# Altium PCB PCB3.PcbDoc
Units mm, origin at the board's own origin, x right, y up, seen from the top; angles counter-clockwise.
Board outline 40 x 40 mm, 2 copper layers (Top Layer, Bottom Layer); 33 components, 27 nets, 120 pads, 15 vias.
Unrouted connection lines stored in the file: 2.
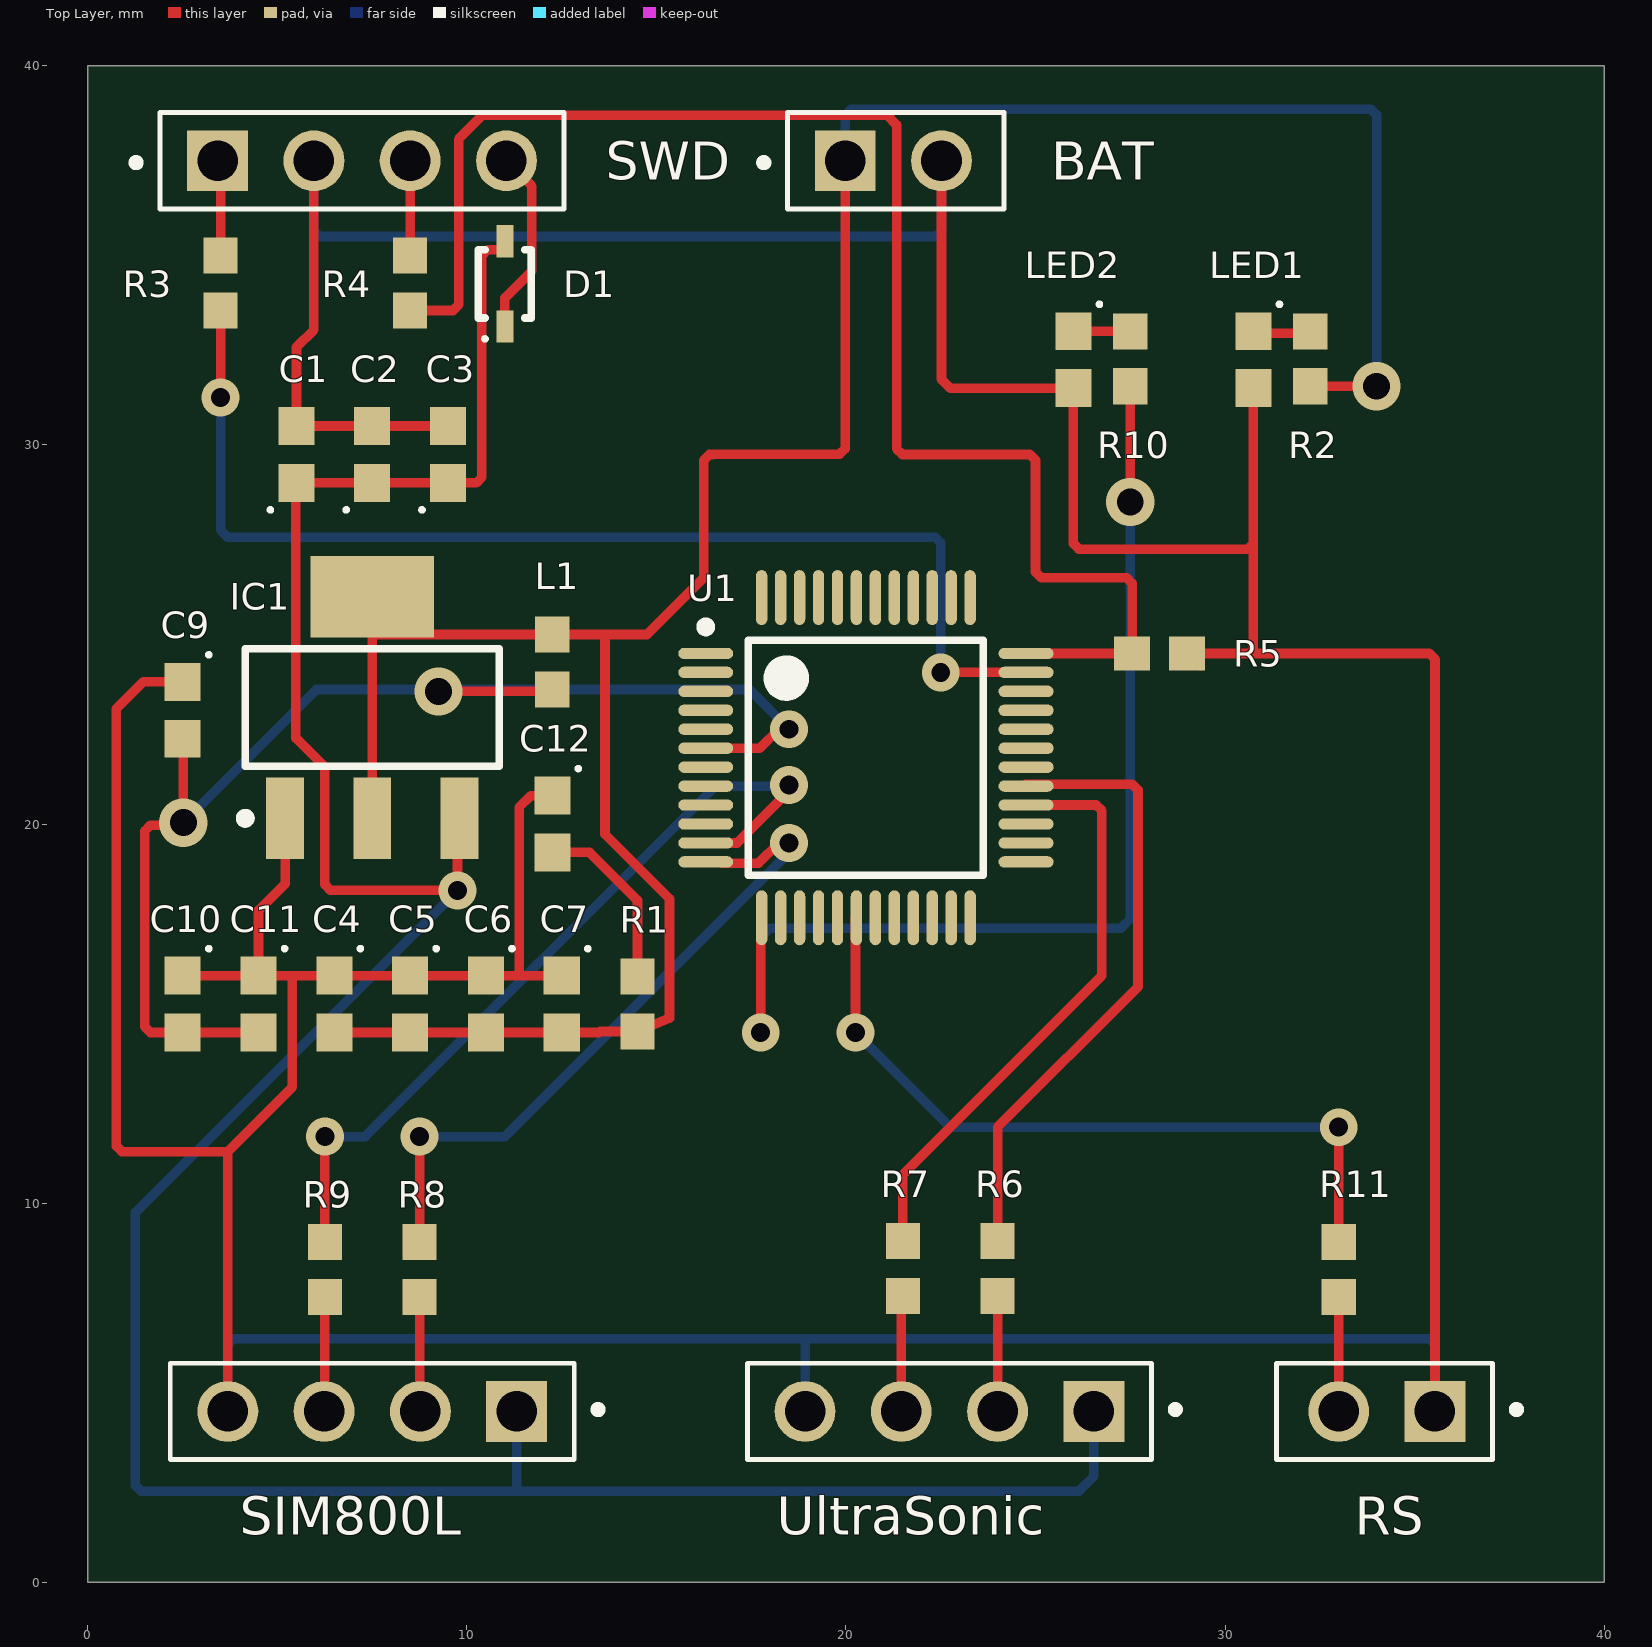
[diagram p0: Top Layer view]
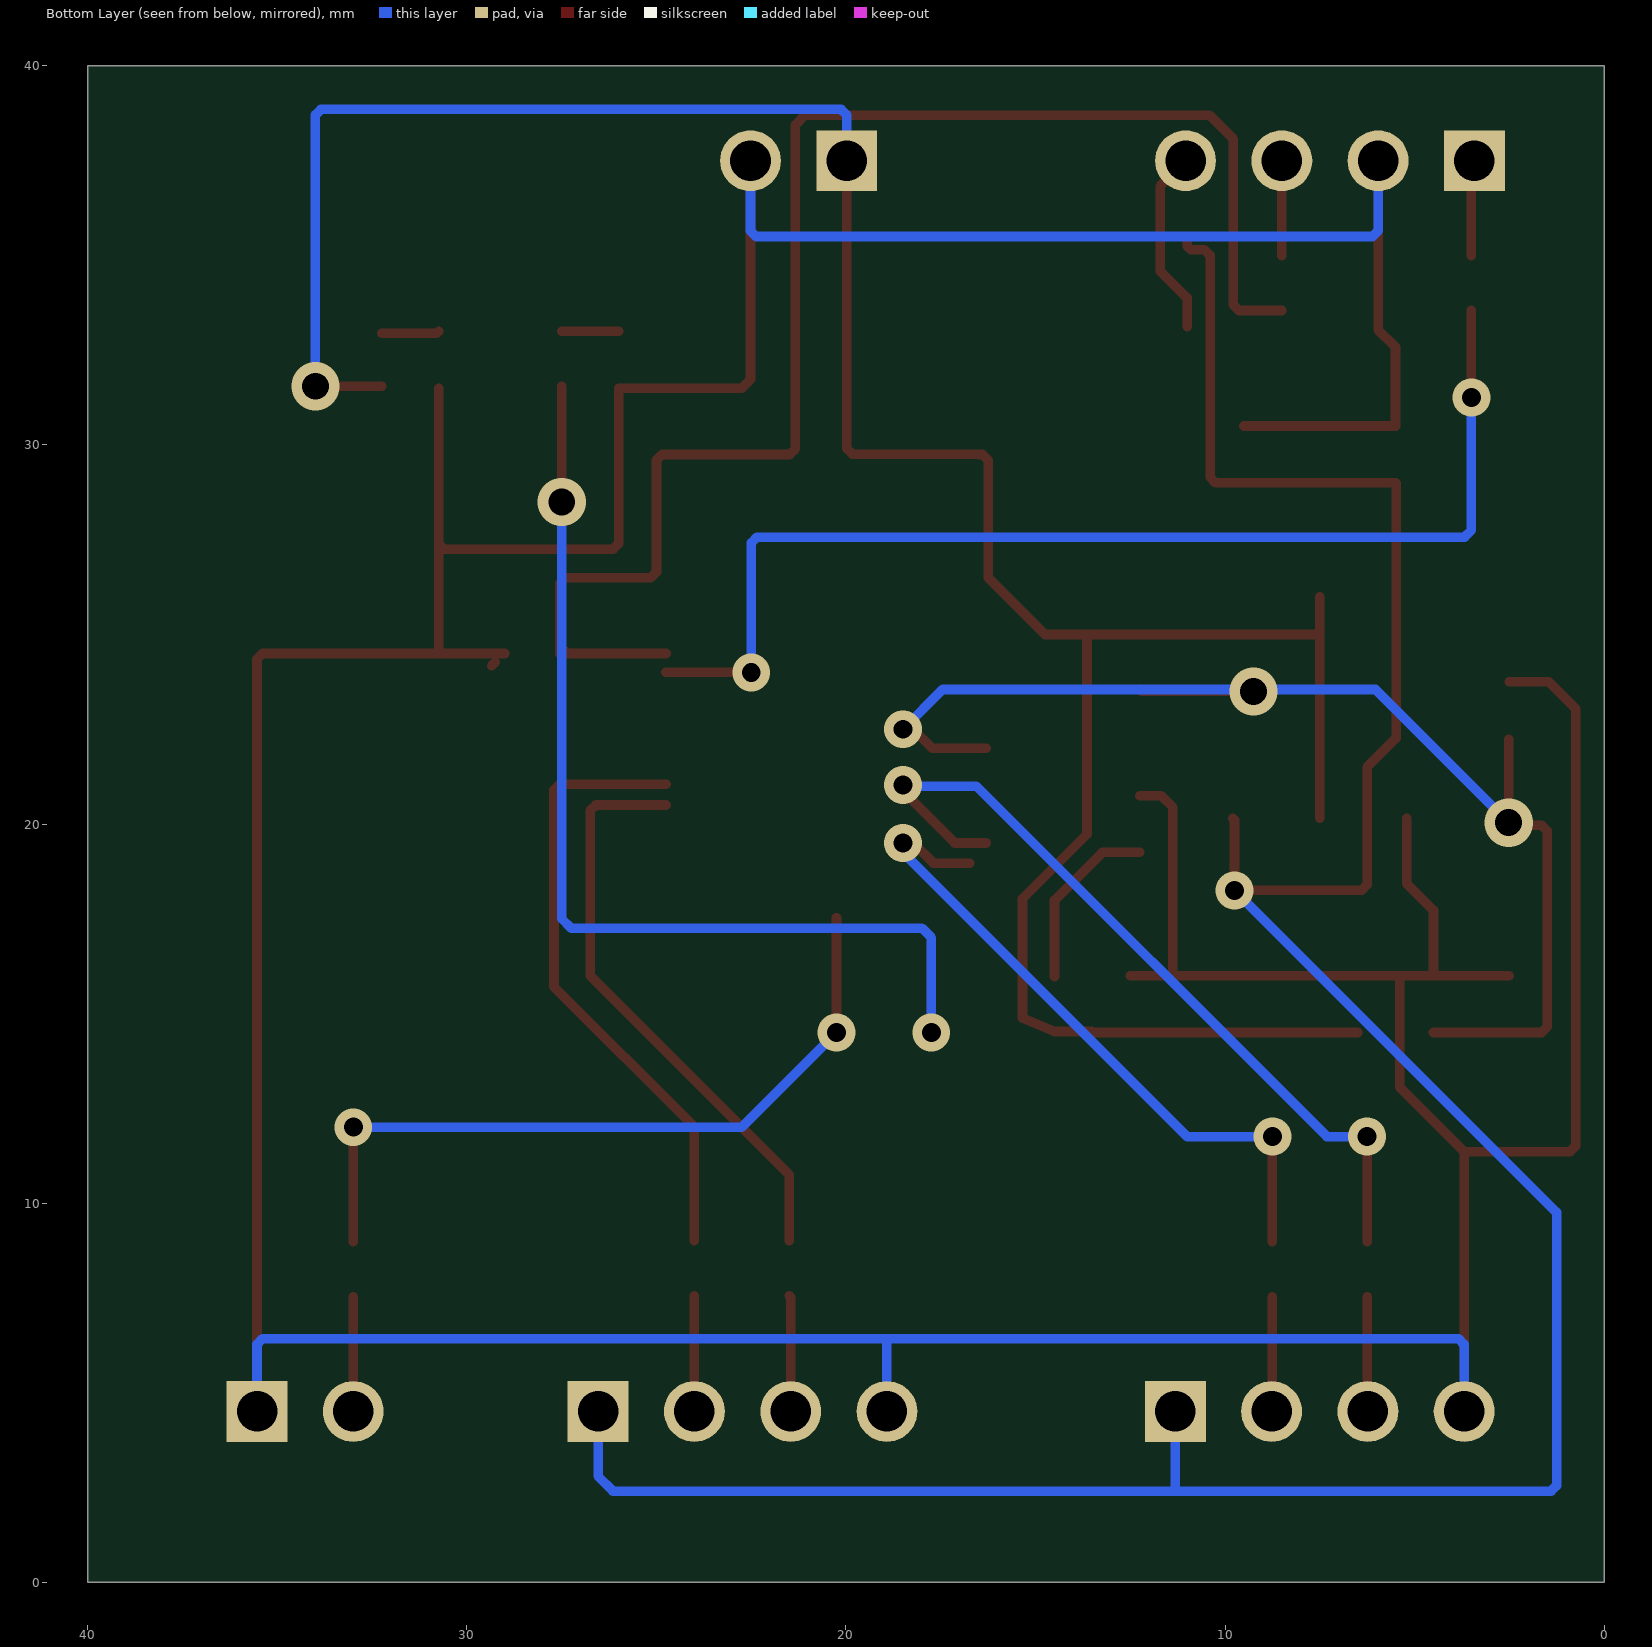
[diagram p1: Bottom Layer view, seen from below]
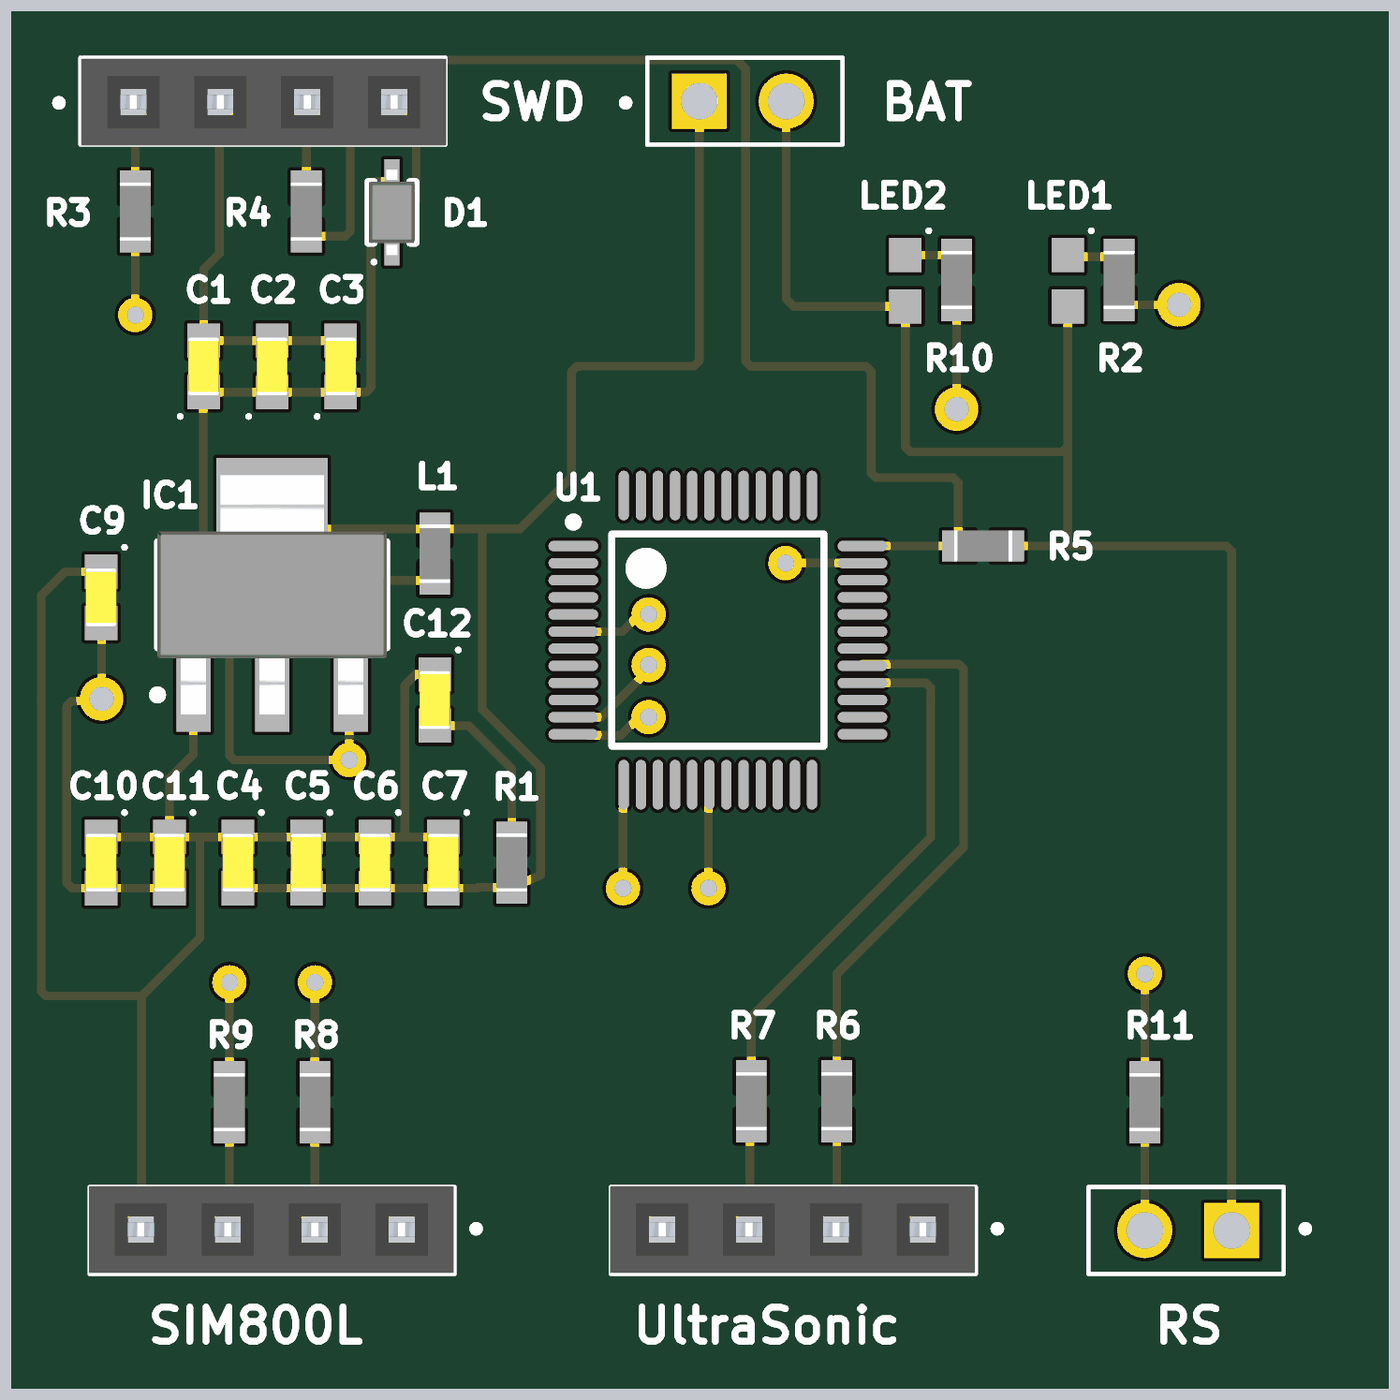
[diagram p2: 3D render of the assembled board from above, using the file's embedded part models]

## Layer stack, top to bottom
Top Solder: solder mask 0.0102, Solder Resist, Dk 3.5
Top Layer: signal copper 0.0356
Dielectric 1: dielectric 0.32, FR-4, Dk 4.8
Bottom Layer: signal copper 0.0356
Bottom Solder: solder mask 0.0102, Solder Resist, Dk 3.5

## Board outline
0,0 0,40 40,40 40,0

## Design rules (kind name [scope] priority, off if disabled: settings)
Clearance [All] p1: gap=0.254 ignorepadtopadclearanceinfootprint=FALSE except(0: Arc-Hole Track-Hole SMDPad-Hole THPad-Hole Via-Hole Fill-Hole Poly-Hole Region-Hole Text-Hole)
PolygonConnect [All] p1: connectstyle=Relief reliefconductorwidth=0.254 reliefentries=4 polygonreliefangle="90 Angle" airgapwidth=0.254
RoutingVias [All] p1: holewidth=0.711 width=1.27 viastyle="Through Hole" minholewidth=0.711 minwidth=1.27 maxholewidth=0.711 maxwidth=1.27
SolderMaskExpansion [All] p1: expansion=0.102 istentingtop=FALSE
Width [All] p1: maxlimit=0.254 minlimit=0.254 preferedwidth=0.254
30 further rules are at their usual default settings.

## Components (designator, comment, footprint, x,y, rotation, side; value= is the part's Value field where it differs from the comment)
BAT "VBat" Vbat 21.25,37.5 r0 top (schematic designator BAT1)
C1 "Capacitor" Capacitor_smd_0863 5.5,29.75 r90 top
C2 "Capacitor" Capacitor_smd_0863 7.5,29.75 r90 top
C3 "Capacitor" Capacitor_smd_0863 9.5,29.75 r90 top
C4 "Capacitor" Capacitor_smd_0863 6.5,15.25 r270 top
C5 "Capacitor" Capacitor_smd_0863 8.5,15.25 r270 top
C6 "Capacitor" Capacitor_smd_0863 10.5,15.25 r270 top
C7 "Capacitor" Capacitor_smd_0863 12.5,15.25 r270 top
C9 "Capacitor" Capacitor_smd_0863 2.5,23 r270 top
C10 "Capacitor" Capacitor_smd_0863 2.5,15.25 r270 top
C11 "Capacitor" Capacitor_smd_0863 4.5,15.25 r270 top
C12 "Capacitor" Capacitor_smd_0863 12.25,20 r270 top
D1 "D_SCHOTTKY" Diod_Shottky 11,34.25 r90 top
IC1 "LD1117" LD1117 7.5,23.075 r90 top
L1 "450 mA" Resistor_smd_0603 12.25,24.275 r270 top
LED1 "Red" Led_smd_0603_Red 30.75,32.25 r270 top
LED2 "Red" Led_smd_0603_Red 26,32.25 r270 top
R1 "10 k" Resistor_smd_0603 14.5,15.25 r270 top
R2 "300 Om" Resistor_smd_0603 32.25,32.275 r90 top
R3 "100 Om" Resistor_smd_0603 3.5,34.275 r270 top
R4 "100 Om" Resistor_smd_0603 8.5,34.275 r270 top
R5 "100 Om" Resistor_smd_0603 28.275,24.5 r180 top
R6 "100 Om" Resistor_smd_0603 24,8.275 r270 top
R7 "100 Om" Resistor_smd_0603 21.5,8.275 r270 top
R8 "100 Om" Resistor_smd_0603 8.75,8.25 r270 top
R9 "100 Om" Resistor_smd_0603 6.25,8.25 r270 top
R10 "300 Om" Resistor_smd_0603 27.5,32.275 r90 top
R11 "300 Om" Resistor_smd_0603 33,8.25 r90 top
RS "Reed_Switch" Vbat 34.27,4.5 r180 top (schematic designator RS1)
SIM800L "SIM800L" Connector_Prog 7.5,4.5 r180 top (schematic designator CN3)
SWD "SWD" Connector_Prog 7.23,37.5 r0 top (schematic designator CN1)
U1 "STM32G070" STM32G070 20.525,21.75 r0 top
UltraSonic "UltraSonic" Connector_Prog 22.73,4.5 r180 top (schematic designator CN2)

## Footprints (in the part's own frame and the unit in brackets; to place one, negate y for a bottom-side part, rotate by r counter-clockwise, add the part's x,y. Pads: shape width x height; smd on the part's side, far side on the other; paste and mask are expansions set on the pad)
Capacitor_smd_0863 [mm] "Chip Capacitor, 2-Leads, Body 1,60x0,80mm, IPC Medium Density"
  rect 1x0.95 smd: 1(-0.75,0) 2(0.75,0)
  silkscreen extent -1.51,0.64 -1.41,0.74, body extent -0.85,-0.45 0.85,0.45, height 0.45
Connector_Prog [mm]
  rect 1.605x1.605 hole 1.07: 1(-3.81,0)
  round 1.605 hole 1.07: 2(-1.27,0) 3(1.27,0) 4(3.81,0)
  silkscreen extent -6.06,-1.27 5.33,1.27, body extent -5.31,-1.3 5.36,1.24, height 8.51
Diod_Shottky [mm] "SODFL, 2-Leads, Body 1,25x2,50mm, IPC Medium Density"
  rect 0.85x0.45 smd: 1(-1.125,0) 2(1.125,0)
  silkscreen extent -1.5,-0.7 0.9,0.7, body extent -1.25,-0.67 1.25,0.67, height 1.1
LD1117 [mm] "SOT223, 4-Leads, Body 6,50x7,00mm (avg), Pitch 2,30mm, IPC Medium Density"
  rect 2.15x1 smd: 1(-2.925,2.3) 2(-2.925,0) 3(-2.925,-2.3)
  rect 2.15x3.25 smd: 4(2.925,0)
  silkscreen extent -3.05,-3.35 1.55,3.47, body extent -3.5,-3.35 3.5,3.35, height 1.8
Led_smd_0603_Red [mm]
  rect 1x0.95 smd: 1(-0.75,0) 2(0.75,0)
  silkscreen extent -1.51,0.64 -1.41,0.74, body extent -0.85,-0.45 0.85,0.45, height 0.5
Resistor_smd_0603 [mm] "Chip Resistor, 2-Leads, Body 1,60x0,80mm, IPC Medium Density"
  rect 0.95x0.9 smd: 1(-0.725,0) 2(0.725,0)
  body extent -0.85,-0.45 0.85,0.45, height 0.45
STM32G070 [mm]
  oval 1.45x0.3 smd: 1(-4.225,2.75) 2(-4.225,2.25) 3(-4.225,1.75) 4(-4.225,1.25) 5(-4.225,0.75) 6(-4.225,0.25) 7(-4.225,-0.25) 8(-4.225,-0.75) 9(-4.225,-1.25) 10(-4.225,-1.75) 11(-4.225,-2.25) 12(-4.225,-2.75) 25(4.225,-2.75) 26(4.225,-2.25) 27(4.225,-1.75) 28(4.225,-1.25) 29(4.225,-0.75) 30(4.225,-0.25) 31(4.225,0.25) 32(4.225,0.75) 33(4.225,1.25) 34(4.225,1.75) 35(4.225,2.25) 36(4.225,2.75)
  oval 0.3x1.45 smd: 13(-2.75,-4.225) 14(-2.25,-4.225) 15(-1.75,-4.225) 16(-1.25,-4.225) 17(-0.75,-4.225) 18(-0.25,-4.225) 19(0.25,-4.225) 20(0.75,-4.225) 21(1.25,-4.225) 22(1.75,-4.225) 23(2.25,-4.225) 24(2.75,-4.225) 37(2.75,4.225) 38(2.25,4.225) 39(1.75,4.225) 40(1.25,4.225) 41(0.75,4.225) 42(0.25,4.225) 43(-0.25,4.225) 44(-0.75,4.225) 45(-1.25,4.225) 46(-1.75,4.225) 47(-2.25,4.225) 48(-2.75,4.225)
  silkscreen extent -4.35,-3.1 3.1,3.57, body extent -3.5,-3.5 3.5,3.5, height 1.6
Vbat [mm]
  rect 1.605x1.605 hole 1.07: 1(-1.27,0)
  round 1.605 hole 1.07: 2(1.27,0)
  silkscreen extent -3.52,-1.27 2.92,1.27

## Part data
C1 C2 C3 C4 C5 C6 C7 C9 C10 C11 C12: Voltage=16v
  C1 C2 C4 C12: Сapacity=10u
  C3 C6 C7 C10 C11: Сapacity=0.1u
  C5 C9: Сapacity=4.7u
D1: library part Diod_Shottky, Voltage=20v
IC1: Voltage=3.3v
L1: library part Filter
LED1 LED2: library part LED
R1 R2 R3 R4 R5 R6 R7 R8 R9 R10 R11: library part Resistor
SIM800L SWD UltraSonic: library part Connector_programming

## Via types
v1: diameter 1, hole 0.5, Top Layer to Bottom Layer, 11 vias
v2: diameter 1.27, hole 0.711, Top Layer to Bottom Layer, 4 vias

## Nets (pads, with @x,y where several pads share a name; then routed paths per layer and width w, separated by ;. In a path a pad name is that pad's centre, name@x,y a point inside that pad or via, vN(x,y) a via of type N, cw(c..) or ccw(c..) an arc to the next point about the centre after c; other vN are vias at no path point)
5v: C1.1 C2.1 C3.1 D1.2 IC1.3 SIM800L.1 UltraSonic.1 | length 76.5
  Top Layer w0.254: IC1.3 9.75,20.1 v1(9.75,18.25) 6.399,18.25 6.25,18.399 6.25,21.5 5.486,22.264 5.486,28.986 C1.1 C2.1 C3.1 10.245,29 10.394,29.149 10.394,35.003 10.543,35.151 10.902,35.151 11,35.249 D1.2
  Bottom Layer w0.254: v1(9.75,18.25) 1.25,9.75 1.25,2.548 1.399,2.399 26.149,2.399 26.54,2.79 UltraSonic.1 ; 11.31,2.5 SIM800L.1
Door: R11.2 U1.18 | length 19.8
  Top Layer w0.254: v1(20.25,14.5) U1.18@20.25,17.525 ; R11.2 33,9.692 v1(33,12)
  Bottom Layer w0.254: v1(20.25,14.5) 22.75,12 v1(33,12)
ECHO: R7.1 U1.28 | length 15.6
  Top Layer w0.254: R7.1 21.5,10.75 26.75,16 26.75,20.351 26.601,20.5 U1.28
GND: BAT.2 C1.2 C2.2 C3.2 C4.1 C5.1 C6.1 C7.1 C9.1 C10.1 C11.1 C12.1 IC1.1 LED1.2 LED2.2 R5.1 RS.1 SIM800L.4 SWD.2 UltraSonic.4 | length 169.6
  Top Layer w0.254: C10.1 C11.1 ; C9.1 1.455,23.75 0.75,23.045 0.75,11.503 0.899,11.354 3.69,11.354 ; SIM800L.4 3.69,11.354 ; IC1.1 5.2,18.423 4.5,17.723 C11.1 ; 5.388,16 5.388,13.053 3.69,11.354 ; SWD.2 5.96,33.04 5.5,32.58 C1.2 C2.2 C3.2 ; C12.1 11.684,20.75 11.379,20.445 11.379,16 ; C7.1 11.379,16 ; BAT.2 22.52,31.73 22.75,31.5 LED2.2 26,27.399 26.149,27.25 30.601,27.25 30.75,27.399 ; R5.1 30.75,24.5 ; R5.1@29.253,24.272 R5.1@29.348,24.177 ; LED1.2 30.75,27.399 ; RS.1 35.54,24.351 35.391,24.5 30.75,24.5 ; C11.1 C4.1 C5.1 C6.1 11.379,16 ; 30.75,24.5 30.75,27.399
  Bottom Layer w0.254: SIM800L.4 3.69,6.271 3.839,6.42 18.92,6.42 ; SWD.2 5.96,35.649 6.109,35.5 22.371,35.5 22.52,35.649 BAT.2 ; UltraSonic.4 18.92,5.708 18.92,6.42 ; RS.1 35.54,6.271 35.391,6.42 18.92,6.42
NetCN1_4: D1.1 SWD.4 | length 4.9
  Top Layer w0.254: D1.1 11,33.879 11.709,34.588 11.709,36.831 SWD.4
NetCN2_2: R6.2 UltraSonic.2 | length 3
  Top Layer w0.254: UltraSonic.2 R6.2
NetCN2_3: R7.2 UltraSonic.3 | length 3.1
  Top Layer w0.254: UltraSonic.3 21.46,7.51 R7.2
NetCN3_2: R8.2 SIM800L.2 | length 3
  Top Layer w0.254: R8.2 8.75,4.52 SIM800L.2
NetCN3_3: R9.2 SIM800L.3 | length 3
  Top Layer w0.254: SIM800L.3 6.25,4.52 R9.2
NetLED1_1: LED1.1 R2.2 | length 1.5
  Top Layer w0.254: LED1.1 30.8,32.95 R2.2@32.25,32.95
NetLED2_1: LED2.1 R10.2 | length 1.5
  Top Layer w0.254: LED2.1 R10.2
NetR3_2: R3.2 U1.35 | length 30.6
  Top Layer w0.254: v1(3.5,31.25) R3.2 ; v1(22.5,24) 23.924,24 U1.35
  Bottom Layer w0.254: v1(3.5,31.25) 3.5,27.75 3.682,27.568 22.351,27.568 22.5,27.419 v1(22.5,24)
NetR4_2: R4.2 R5.2 U1.36 | length 40.2
  Top Layer w0.254: R4.2 9.63,33.55 9.779,33.699 9.779,38.068 10.414,38.703 21.082,38.703 21.336,38.449 21.336,29.899 21.485,29.75 24.851,29.75 25,29.601 25,26.649 25.149,26.5 27.401,26.5 27.55,26.351 R5.2 ; U1.36 27.354,24.5 R5.2@27.427,24.573
NetR11_1: R11.1 RS.2 | length 3
  Top Layer w0.254: RS.2 R11.1
NetU1_2: U1.2
NetU1_3: U1.3
NetU1_8: U1.8
NetU1_9: U1.9
NRST: C12.2 R1.1 U1.10 | length 4.8
  Top Layer w0.254: C12.2 13.233,19.25 14.5,17.983 R1.1
SWCLK: R4.1 SWD.3 | length 2.5
  Top Layer w0.254: R4.1 SWD.3
SWDIO: R3.1 SWD.1 | length 2.5
  Top Layer w0.254: SWD.1 3.5,37.42 R3.1
TRIG: R6.1 U1.29 | length 16.4
  Top Layer w0.254: R6.1 24,12 27.704,15.704 27.704,20.897 27.555,21.046 U1.29@24.75,21.046
UART_RX: R8.1 U1.12 | length 17.9
  Top Layer w0.254: R8.1 v1(8.75,11.75) ; U1.12@16.732,18.969 17.694,18.969 18.225,19.5 v1(18.5,19.5)
  Bottom Layer w0.254: v1(8.75,11.75) 11,11.75 18.5,19.25 v1(18.5,19.5)
UART_TX: R9.1 U1.11 | length 21.8
  Top Layer w0.254: R9.1 v1(6.25,11.75) ; U1.11 17.126,19.5 18.5,20.874 v1(18.5,21.024)
  Bottom Layer w0.254: v1(6.25,11.75) 7.313,11.75 16.563,21 18.476,21 v1(18.5,21.024)
"User Led": R10.1 U1.13 | length 28.9
  Top Layer w0.254: v1(17.75,14.5) U1.13@17.75,16.85 ; v2(27.5,28.5) R10.1
  Bottom Layer w0.254: v1(17.75,14.5) 17.75,17 18,17.25 27.25,17.25 27.5,17.5 v2(27.5,28.5)
VBAT: BAT.1 C4.2 C5.2 C6.2 C7.2 IC1.2 IC1.4 L1.1 R1.2 R2.1 | length 73.8
  Top Layer w0.254: C4.2 C5.2 C6.2 C7.2 13.487,14.5 13.512,14.525 R1.2 15.342,14.881 15.342,18.027 13.64,19.729 13.64,25 ; IC1.2 IC1.4@7.5,25 ; IC1.4 IC1.4@7.5,25 ; BAT.1 19.98,29.906 19.831,29.757 16.507,29.757 16.5,29.75 16.399,29.75 16.25,29.601 16.25,26.5 14.75,25 13.64,25 ; R2.1 v2(34,31.55) ; IC1.4@7.5,25 L1.1 13.64,25
  Bottom Layer w0.254: BAT.1 19.98,38.707 20.129,38.855 33.851,38.855 34,38.707 v2(34,31.55)
VDD/VDDA: C9.2 C10.2 C11.2 L1.2 U1.6 U1.7 | length 34.9
  Top Layer w0.254: C9.2@2.515,22.235 v2(2.515,20.034) 2.452,19.971 1.649,19.971 1.5,19.822 1.5,14.649 1.649,14.5 C10.2 C11.2 ; v2(9.25,23.5) 12.2,23.5 L1.2 ; U1.6 17.725,22 18.225,22.5 v1(18.5,22.5)
  Bottom Layer w0.254: v2(2.515,20.034) 6.031,23.55 9.2,23.55 v2(9.25,23.5) 9.3,23.55 17.45,23.55 v1(18.5,22.5)
pads on no net: U1.1 U1.4 U1.5 U1.14 U1.15 U1.16 U1.17 U1.19 U1.20 U1.21 U1.22 U1.23 U1.24 U1.25 U1.26 U1.27 U1.30 U1.31 U1.32 U1.33 U1.34 U1.37 U1.38 U1.39 U1.40 U1.41 U1.42 U1.43 U1.44 U1.45 U1.46 U1.47 U1.48

## Silkscreen, mask and mechanical layers (free items; w line width, h text height)
Body:
  the board outline again, w0.254